# Altium PCB PCB_receiveClient.pcbdoc
Units mil, origin at the board's own origin, x right, y up, seen from the top; angles counter-clockwise.
Board outline 3360 x 2303.74 mil, 2 copper layers (Top Layer, Bottom Layer); 21 components, 44 nets, 97 pads, 19 vias.
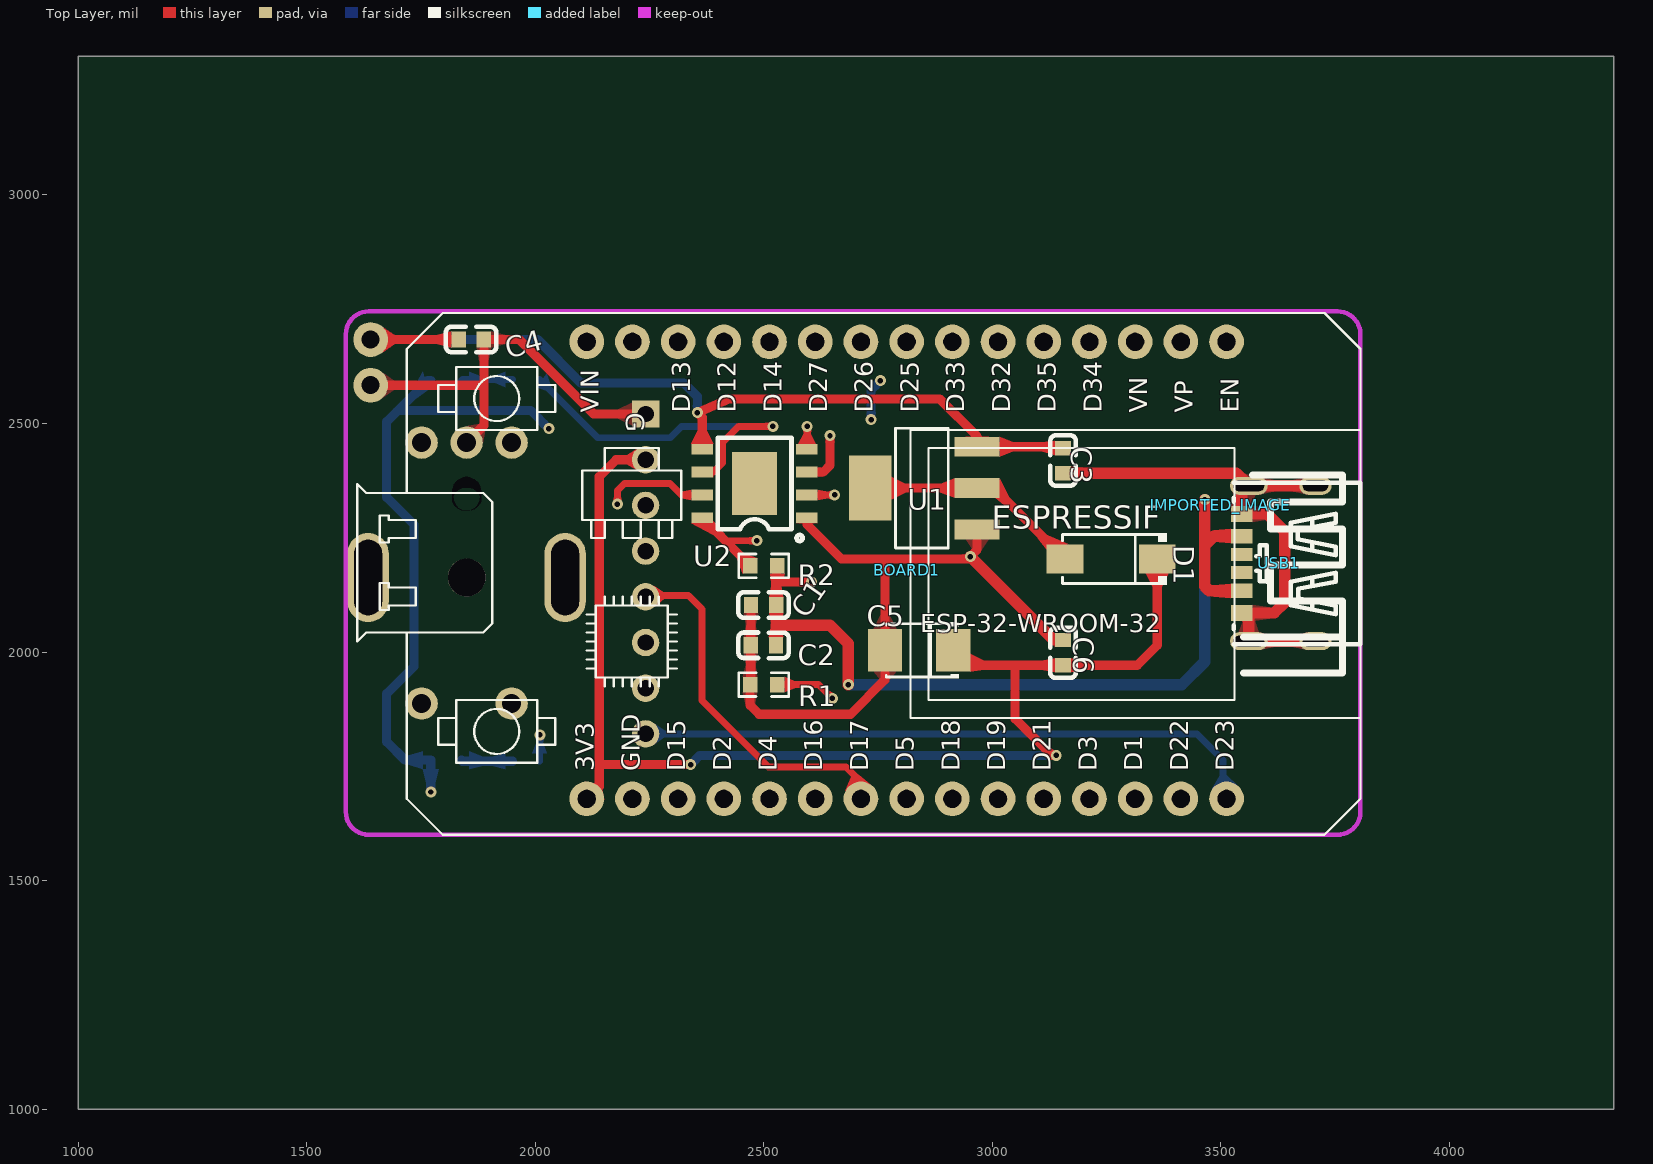
[diagram p0: Top Layer view]
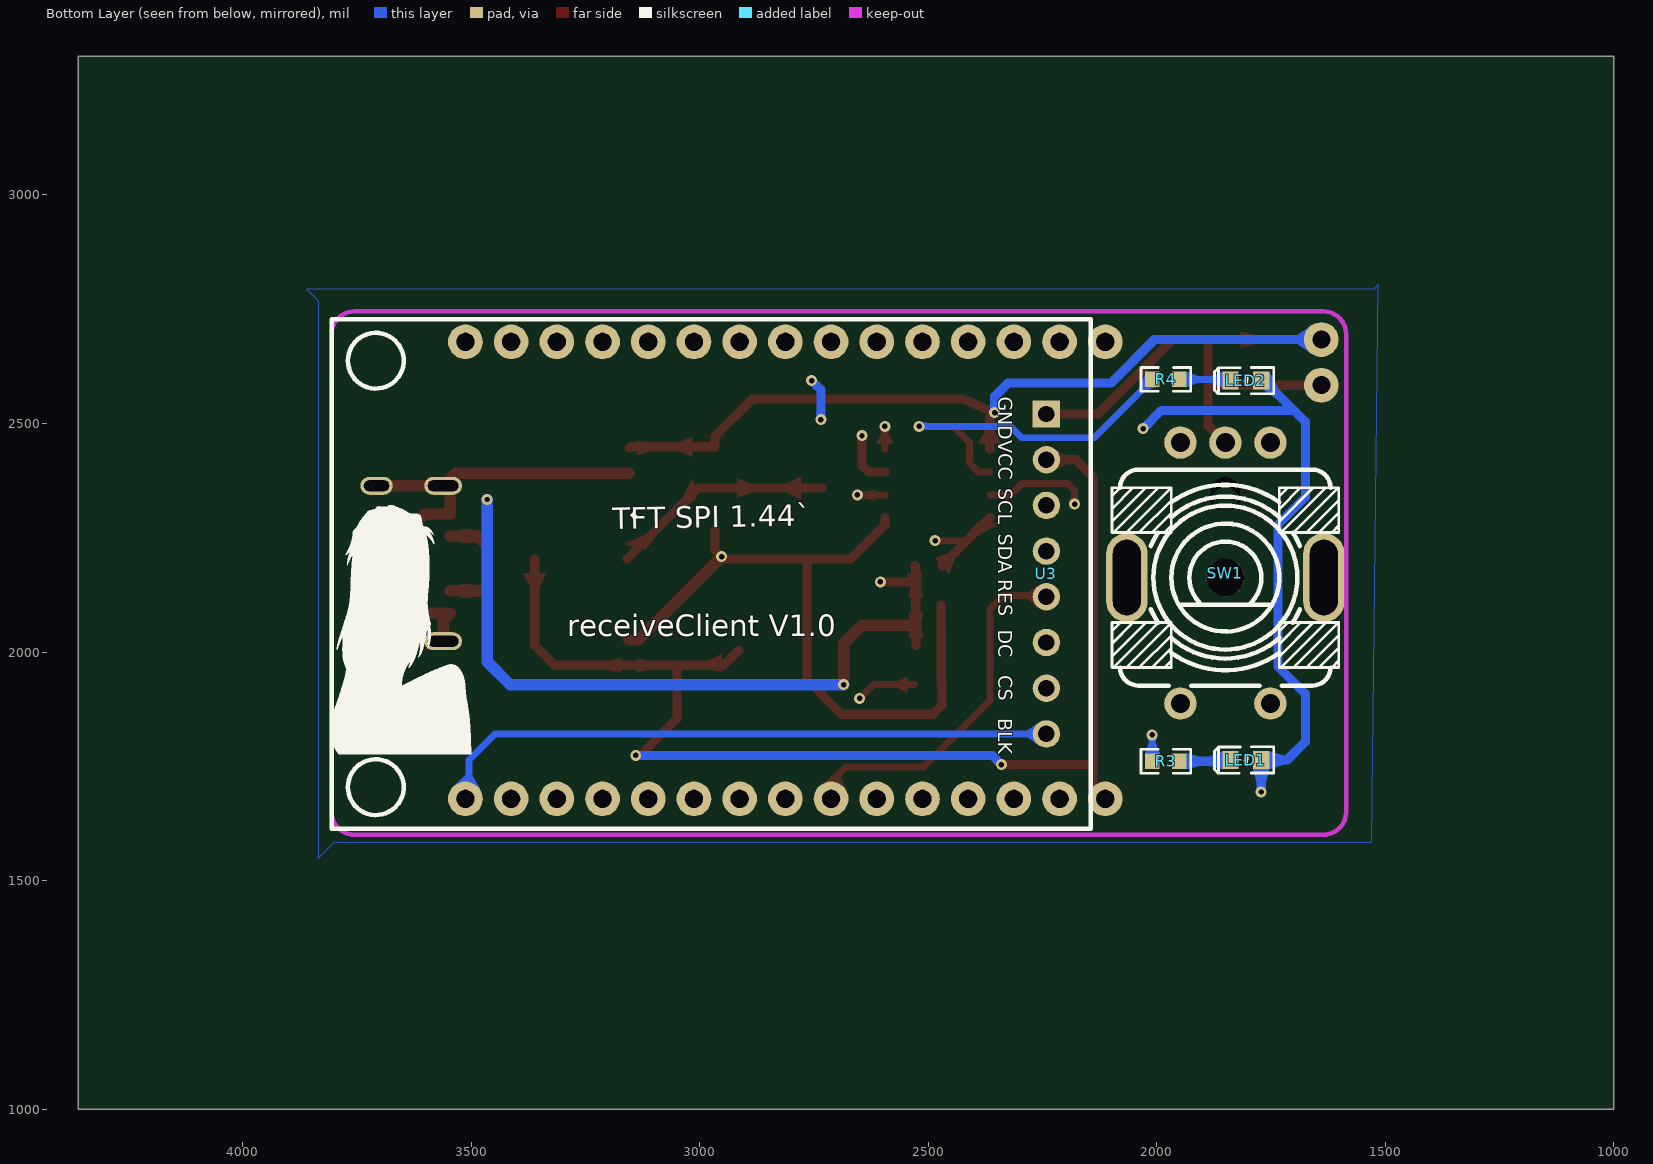
[diagram p1: Bottom Layer view, seen from below]

## Layer stack, top to bottom
Top Layer: signal copper (thickness not stored)
Dielectric: dielectric 12.6, FR-4, Dk 4.8
Bottom Layer: signal copper (thickness not stored)

## Board outline
4360,1000 1000,1000 1000,3303.74 4360,3303.74

## Components (designator, comment, footprint, x,y, rotation, side; value= is the part's Value field where it differs from the comment)
BOARD1 "ESP32DEVKITV1" ESP32-DEVKITV1 2112.68,1678.74 r0 top
C1 "0.1μF" C0603 2499.8,2102.65 r0 top
C2 "10μF" C0603 2499.19,2014.83 r180 top
C3 "10μF" C0603 3154.78,2418.74 r270 top
C4 "0.1μF" C0603 1860,2683.74 r0 top
C5 "100uF" CAP-SMD_L3.5-W2.8-R-RD 2840,2003.74 r0 top
C6 "1μF" C0603 3155,1998.74 r90 top
D1 "SS14" SMA_L4.4-W2.8-LS5.4-RD 3260,2203.74 r180 top
IMPORTED_IMAGE "IMPORTED_IMAGE" IMPORTED_IMAGE 3499.99,2321.36 r0 top
LED1 "LED-0603_R" LED0603_RED 1805,1763.74 r180 bottom
LED2 "LED-0603_G" LED0603_GREEN 1805,2593.74 r180 bottom
R1 "2k" R0603#1 2500,1928.74 r0 top
R2 "0" R0603#1 2500,2188.74 r180 top
R3 "4.7k" R0603#2 1980,1761.01 r0 bottom
R4 "4.7k" R0603#2 1980,2596.47 r0 bottom
SW1 "EC11K1524406" SW-TH_EC11K1524406 1850,2172.77 r180 bottom
U1 "AMS1117-3.3" SOT-223-3_L6.5-W3.4-P2.30-LS7.0-BR 2850,2358.74 r0 top
U2 "TP4056" ESOP-8_L4.9-W3.9-P1.27-LS6.0-BL-EP 2480,2368.74 r90 top
U3 "1.44TFT128X128" 1.44TFT128X128 2241.42,2170.86 r90 bottom
USB1 "KH-TYPE-C-6P" TYPE-C-SMD_TYPE-C-31-M-16 3626.45,2193.74 r90 top
? "" ? 2685,2543.82 r0 top

## Footprints (in the part's own frame and the unit in brackets; to place one, negate y for a bottom-side part, rotate by r counter-clockwise, add the part's x,y. Pads: shape width x height; smd on the part's side, far side on the other; paste and mask are expansions set on the pad)
1.44TFT128X128 [mil]
  rect 60x60 hole 36: 1(350,0)
  round 60 hole 36: 2(250,0) 3(150,0) 4(50,0) 5(-50,0) 6(-150,0) 7(-250,0) 8(-350,0)
  silkscreen extent -557,-97 557,1564
C0603 [mm]
  rect 0.8x0.9 smd: 1(-0.7,0) 2(0.7,0)
  silkscreen extent -1.41,-0.71 1.39,0.72
CAP-SMD_L3.5-W2.8-R-RD [mm]
  rect 1.9x2.376 smd: 1(1.899,0) 2(-1.899,0)
  silkscreen extent -1.83,-1.55 2.21,1.55
ESOP-8_L4.9-W3.9-P1.27-LS6.0-BL-EP [mm]
  rect 0.6x1.2 smd: 1(-1.905,-2.908) 2(-0.635,-2.908) 3(0.635,-2.908) 4(1.905,-2.908) 5(1.905,2.908) 6(0.635,2.908) 7(-0.635,2.908) 8(-1.905,2.908)
  rect 3.5x2.5 smd: 9(0,0)
  silkscreen extent -3.2,-2.67 2.55,2.05
ESP32-DEVKITV1 [mil]
  round 76 hole 39.36: 3V3(0,0) D1(1200,0) D2(300,0) D3(1100,0) D4(400,0) D5(700,0) D12(300,1000) D13(200,1000) D14(400,1000) D15(200,0) D16(500,0) D17(600,0) D18(800,0) D19(900,0) D21(1000,0) D22(1300,0) D23(1400,0) D25(700,1000) D26(600,1000) D27(500,1000) D32(900,1000) D33(800,1000) D34(1100,1000) D35(1000,1000) EN(1400,1000) GND(100,1000) GND@1(100,0) VIN(0,1000) VN(1200,1000) VP(1300,1000)
  silkscreen extent -502,-79 1693,1063
IMPORTED_IMAGE [mil]
LED0603_GREEN [mm]
  rect 0.9x1 smd: 1(0.85,0) 2(-0.85,0)
  silkscreen extent -1.75,-0.73 1.54,0.73
LED0603_RED [mm]
  rect 0.9x1 smd: 1(0.85,0) 2(-0.85,0)
  silkscreen extent -1.75,-0.73 1.54,0.73
R0603#1 [mil]
  rect 31.75x34.02 smd: 1(-29.65,0) 2(29.66,0)
  silkscreen extent -55,-26 55,26
R0603#2 [mil]
  rect 31.75x34.02 smd: 1(29.65,0) 2(-29.65,0)
  silkscreen extent -55,-26 55,26
SMA_L4.4-W2.8-LS5.4-RD [mm]
  rect 2.046x1.62 smd: 1(-2.566,0) 2(2.565,0)
  silkscreen extent -3.08,-1.44 2.7,1.44
SOT-223-3_L6.5-W3.4-P2.30-LS7.0-BR [mm]
  rect 2.5x1.1 smd: 1(2.97,-2.3) 2(2.97,0) 3(2.97,2.3)
  rect 2.34x3.6 smd: 4(-2.97,0)
  silkscreen extent -1.57,-3.33 1.37,3.33
SW-TH_EC11K1524406 [mm]
  round 1.8 hole 1.05: A(2.5,7.25) B(-2.5,7.25) C(0,7.25) D(2.5,-7.25) E(-2.5,-7.25)
  oval 2.3x4.95 hole 1.55 slot 4.2 at 90 deg: MH1(5.475,-0.25) MH2(-5.475,-0.25)
  round 2.1 hole 2.1 unplated: ""(0,-0.25)
  Multi-Layer board cut-out: 0.8,4.55 0.8,3.95 0.59,3.652 0.27,3.478 -0.094,3.465 -0.427,3.614 -0.659,3.895 -0.742,4.25 -0.742,4.25 -0.523,4.556 -0.188,4.728 0.188,4.728 0.523,4.556 0.742,4.25 0.742,4.25 0.742,4.25 0.659,3.895 0.427,3.614 0.094,3.465 -0.27,3.478 -0.59,3.652 -0.8,3.95 -0.8,3.95 -0.8,3.95 -0.8,4.55 -0.8,4.55 -0.721,4.897 -0.499,5.175 -0.178,5.33 0.178,5.33 0.499,5.175 0.721,4.897 0.8,4.55 0.8,4.55 0.8,4.55
  silkscreen extent -6.3,-6.25 6.3,5.75
TYPE-C-SMD_TYPE-C-31-M-16 [mm]
  oval 1x2.1 hole 0.6 slot 1.7 at 90 deg: 1(-4.32,1.65) 2(4.32,1.65)
  oval 1x1.8 hole 0.6 slot 1.4 at 90 deg: 3(-4.32,-2.05) 4(4.32,-2.05)
  rect 0.7x1.2 smd: A5(-0.5,2.05) B5(0.5,2.05)
  rect 0.8x1.2 smd: A9(1.52,2.05) B9(-1.52,2.05)
  rect 0.9x1.2 smd: A12(2.75,2.05) B12(-2.75,2.05)
  silkscreen extent -4.5,-4.55 4.5,2.49
? [mil]

## Free pads (board coordinates)
  round 75.98 hole 39.37: ""(1640,2583.74) ""(1640,2683.74)

## Via types
v1: diameter 24, hole 12, Top Layer to Bottom Layer, 19 vias

## Nets (pads, with @x,y where several pads share a name; then routed paths per layer and width w, separated by ;. In a path a pad name is that pad's centre, name@x,y a point inside that pad or via, vN(x,y) a via of type N, cw(c..) or ccw(c..) an arc to the next point about the centre after c; other vN are vias at no path point)
3V3: BOARD1.3V3 C5.1 C6.1 D1.1 U3.2 | length 2753.2
  Top Layer w20: BOARD1.3V3 2140,1706.04 2140,2383.74 2177.1,2420.84 U3.2@2241.4,2420.84 ; 2140,1759.35 2145.61,1753.74 v1(2340,1753.74) ; C5.1@2914.8,2003.74 2947.3,1971.14 3155,1971.14 3317.4,1971.14 3361,2014.74 D1.1 ; 3044.71,1971.18 3050,1965.89 3050,1853.74 3130,1773.74 v1(3140,1773.74)
  Bottom Layer w20: v1(2340,1753.74) 2360,1773.74 v1(3140,1773.74)
BAT: C3.1 C4.1 pad.@1640,2683.74 U1.3 U2.5 | length 1941.7
  Top Layer w20: pad.@1640,2683.74 C4.1 ; U2.5 2365.5,2513.24 v1(2355,2523.74) 2425,2553.74 2885,2553.74 2966.9,2471.74 U1.3@2966.9,2449.74 ; U1.3@2966.9,2449.24 3151.8,2449.24 C3.1
  Bottom Layer w20: pad.@1640,2683.74 2005,2683.74 2100,2588.74 2325,2588.74 2355,2558.74 v1(2355,2523.74)
BOARD1_D1: BOARD1.D1
BOARD1_D2: BOARD1.D2
BOARD1_D3: BOARD1.D3
BOARD1_D4: BOARD1.D4
BOARD1_D5: BOARD1.D5
BOARD1_D12: BOARD1.D12
BOARD1_D13: BOARD1.D13
BOARD1_D14: BOARD1.D14
BOARD1_D15: BOARD1.D15
BOARD1_D16: BOARD1.D16
BOARD1_D32: BOARD1.D32
BOARD1_D33: BOARD1.D33
BOARD1_D34: BOARD1.D34
BOARD1_D35: BOARD1.D35
BOARD1_EN: BOARD1.EN
BOARD1_GND: BOARD1.GND
BOARD1_VIN: BOARD1.VIN
BOARD1_VN: BOARD1.VN
BOARD1_VP: BOARD1.VP
D0: BOARD1.D25 SW1.D | length 1600
  Mid-Layer 1 w15: SW1.D 1955,2090.74 1955,2343.74 2080,2468.74 2405,2468.74 2485,2548.74 2790,2548.74 2812.7,2571.44 BOARD1.D25
D1: BOARD1.D26 SW1.A | length 1134.3
  Mid-Layer 1 w20: SW1.A 1751.57,2510.31 1825,2583.74 2695,2583.74 2720,2608.74 2720,2671.42 BOARD1.D26
D2: BOARD1.D27 SW1.B | length 835.4
  Mid-Layer 2 w15: SW1.B 1955,2464.74 1955,2563.74 2005,2613.74 2585,2613.74 2612.7,2641.44 BOARD1.D27
GND: BOARD1.GND@1 C1.1 C2.2 C3.2 C4.2 C5.2 C6.2 pad.@1640,2583.74 R1.1 SW1.C SW1.E U1.1 U2.1 U2.3 U3.1 USB1.1 USB1.2 USB1.3 USB1.4 USB1.A12 USB1.B12 | length 8577.3
  Top Layer w20: pad.@1640,2583.74 1887.56,2583.74 ; SW1.C 1887.6,2495.74 C4.2 1965,2683.74 2127.9,2520.84 U3.1@2241.4,2520.84 ; C1.1@2472.2,2102.64 C2.2 2471.6,1930.04 R1.1 2470.3,1883.44 2490,1863.74 2690,1863.74 2765.2,1938.94 2765.2,2003.74 2765.2,2202.04 2766.9,2203.74 ; U2.1 2594.5,2279.24 2670,2203.74 2946.9,2203.74 v1(2951.92,2208.74) 2966.9,2223.74 U1.1 ; U2.3 2630,2393.74 2645,2408.74 v1(2645,2473.74)
  Top Layer w25: v1(2951.92,2208.74) 3134.4,2026.34 C6.2 ; C3.2@3154.8,2391.14 3534.1,2391.14 USB1.2 ; USB1.3@3707.2,2023.64 3561.5,2023.64 3561.5,2069.74 3545.7,2085.44 3616.7,2085.44 3640,2108.74 3640,2263.74 3601.7,2302.04 USB1.A12 3545.7,2348.04 USB1.2 ; USB1.4 USB1.2
  Mid-Layer 1 w20: pad.@1640,2583.74 1640,2428.74 1685,2383.74 1775.53,2383.74 SW1.C ; 2212.7,1678.74 2397.7,1863.74 3445,1863.74 3561.5,1980.24 USB1.1@3561.5,2023.64
  Mid-Layer 2 w15: SW1.E 1949.82,1888.74 2120,1888.74 2150,1858.74 2150,1773.74 2212.68,1711.06 2212.68,1678.74
  Mid-Layer 2 w20: pad.@1640,2583.74 1815,2583.74 1850,2548.74 SW1.C 1960,2348.19 1960,1898.92 SW1.E ; v1(2645,2473.74) 2815,2473.74 2955,2333.74 2955,2211.82 v1(2951.92,2208.74)
  Mid-Layer 2 w25: v1(2951.92,2208.74) 2951.9,2206.84 3135.1,2023.64 3561.5,2023.64 USB1.3@3707.2,2023.64 ; USB1.2 USB1.4
LED1_2: LED1.2 R3.2 | length 112.9
  Bottom Layer w20: LED1.2 1841.2,1761.04 R3.2
LED2_2: LED2.2 R4.2 | length 112.9
  Bottom Layer w15: LED2.2 1841.2,2596.44 R4.2@1950.3,2596.44
SW1_MH1: SW1.MH1
SW1_MH2: SW1.MH2
TFT_BLK: BOARD1.D23 U3.8 | length 1375.4
  Bottom Layer w15: U3.8 3447.88,1820.87 3505,1763.74 3505,1686.42 BOARD1.D23
TFT_CS: BOARD1.D18 U3.7 | length 773.6
  Mid-Layer 2 w15: U3.7 2241.42,1917.32 2395,1763.74 2827.68,1763.74 BOARD1.D18
TFT_DC: BOARD1.D19 U3.6 | length 947.3
  Mid-Layer 2 w15: U3.6 2241.42,2012.32 2320,1933.74 2320,1883.74 2405,1798.74 2892.68,1798.74 BOARD1.D19
TFT_RST: BOARD1.D17 U3.5 | length 795.8
  Top Layer w15: U3.5 2244.29,2123.74 2335,2123.74 2365,2093.74 2365,1893.74 2510,1748.74 2680,1748.74 2712.68,1716.06 BOARD1.D17
TFT_SCL: BOARD1.D22 U3.3 | length 1628.1
  Mid-Layer 2 w15: U3.3 2241.42,2317.32 2370,2188.74 2370,2003.74 2435,1938.74 2435,1898.74 2465,1868.74 3320,1868.74 3410,1778.74 3410,1681.42 BOARD1.D22
TFT_SDA: BOARD1.D21 U3.4 | length 1220.4
  Mid-Layer 2 w15: U3.4@2241.4,2220.84 2252.9,2220.84 2335,2138.74 2335,1978.74 2385,1928.74 2385,1873.74 2425,1833.74 2965,1828.74 3000,1791.44 BOARD1.D21
U1_2: D1.2 U1.2 U1.4 | length 490.1
  Top Layer w20: U1.4 U1.2 3004,2358.74 D1.2
U2_2: R1.2 U2.2 | length 640.3
  Top Layer w15: R1.2 2620,1928.74 v1(2650,1898.74) ; U2.2 v1(2655,2343.74)
  Mid-Layer 2 w15: v1(2650,1898.74) 2650,2338.74 v1(2655,2343.74)
U2_4: R2.2 U2.4 U2.8 | length 610.3
  Top Layer w15: 2415.5,2243.64 v1(2485,2243.74) ; U2.4 v1(2595,2493.74)
  Top Layer w20: U2.8 R2.2
  Mid-Layer 1 w15: v1(2485,2243.74) 2565,2243.74 2595,2273.74 v1(2595,2493.74)
U2_6: R4.1 U2.6 | length 795.8
  Top Layer w15: U2.6 2390,2393.74 2410,2413.74 2410,2458.74 2445,2493.74 v1(2520,2493.74)
  Bottom Layer w15: R4.1@2009.7,2596.44 2137.4,2468.74 2295,2468.74 2320,2493.74 v1(2520,2493.74)
U2_7: R3.1 U2.7 | length 950.1
  Top Layer w15: v1(2180,2323.74) 2180,2353.74 2195,2368.74 2295,2368.74 2320,2343.74 U2.7
  Mid-Layer 1 w15: v1(2010,1818.74) 2155,1818.74 2180,1843.74 v1(2180,2323.74)
  Bottom Layer w15: R3.1 v1(2010,1818.74)
U2_9: U2.9
USB1_A5: USB1.A5
USB1_B5: USB1.B5
VCC: C1.2 C2.1 LED1.1 LED2.1 R2.1 USB1.A9 USB1.B9 | length 4723.4
  Top Layer w20: C2.1@2526.8,2014.84 2527.4,2102.64 2527.4,2186.44 R2.1 ; 2527.4,2153.24 v1(2605,2153.74)
  Top Layer w25: 2527.09,2058.74 2645,2058.74 2685,2018.74 v1(2685,1928.74) ; v1(3465,2333.74) 3465,2233.74 ; USB1.B9 3474.8,2133.94 3465,2143.74 3465,2233.74 ; USB1.A9@3545.7,2253.54 3484.8,2253.54 3465,2233.74
  Mid-Layer 1 w20: v1(2605,2153.74) 2735,2283.74 v1(2735,2508.74)
  Mid-Layer 2 w20: v1(2030,2488.74) 2120,2578.74 2740,2578.74 v1(2755,2593.74)
  Bottom Layer w20: 1697.63,2526.37 1700,2528.74 1990,2528.74 v1(2030,2488.74) ; v1(1771.53,1693.74) LED1.1 1715,1763.74 1675,1803.74 1675,1908.74 1735,1968.74 1735,2278.74 1675,2338.74 1675,2503.74 1765,2593.74 LED2.1 ; v1(2735,2508.74) 2735,2573.74 v1(2755,2593.74)
  Bottom Layer w25: v1(2685,1928.74) 3415,1928.74 3465,1978.74 v1(3465,2333.74)
pads on no net: SW1.

## Polygon pours and split planes (outlines as drawn)
GND on Bottom Layer (solid): 1515,2803.74 1525,2793.74 3860,2793.74 3835,2768.74 3835,1548.74 3800,1583.74 1530,1583.74
GND on Mid-Layer 1 (solid): 1500,2793.74 1505,2788.74 3825,2788.74 3830,2783.74 3830,1563.74 3815,1578.74 1545,1578.74
GND on Top Layer (solid): 1510,2793.74 3825,2793.74 3835,2783.74 3835,1548.74 3825,1558.74 1540,1558.74
GND on Mid-Layer 2 (solid): 1510,2778.74 1515,2783.74 3820,2783.74 3835,2768.74 3835,1543.74 3800,1578.74 1555,1578.74

## Keep-outs
Keep-Out Layer:
  lines w10: 1585.59,1650.27 ccw(c1635.59,1650.27) 1635.59,1600.27 ; 1585.59,2695.28 cw(c1635.59,2695.28) 1635.59,2745.28 ; 3755.59,1600.27 ccw(c3755.59,1650.27) 3805.59,1650.27 ; 3755.59,2745.28 cw(c3755.59,2695.28) 3805.59,2695.28

## Other copper
Top Layer:
  region net U2_4: 2389.12,2286.35 2341.88,2281.93 2388.85,2256.2 2414.7,2258.62
  region net U2_7: 2341.88,2331.93 2341.88,2355.55 2320,2351.24 2320,2336.24
  region net U2_6: 2389.12,2405.55 2389.12,2381.93 2390,2386.24 2390,2401.24
  region net BAT: 2341.88,2455.55 2389.12,2455.55 2375.5,2485.55 2355.5,2485.55
  region net U2_4: 2575.87,2455.55 2613.37,2455.55 2602.34,2478.05 2587.34,2478.05
  region net U2_2: 2618.12,2355.55 2618.12,2331.93 2640.62,2336.24 2640.62,2351.24
  region net U1_2: 2779.13,2383.74 2779.13,2333.74 2809.13,2348.74 2809.13,2368.74
  region net BAT: 3016.14,2470.94 3016.14,2427.64 3046.14,2439.29 3046.14,2459.29
  region net BAT: 2941.92,2470.94 2991.92,2470.94 2976.92,2471.74 2956.92,2471.74
  region net U1_2: 2917.71,2337.09 2917.71,2380.39 2887.71,2368.74 2887.71,2348.74
  region net U1_2: 3016.14,2380.39 3006.54,2337.09 3032.59,2316 3037.72,2339.16
  region net VCC: 2513.78,2171.73 2545.53,2171.73 2537.36,2141.73 2517.36,2141.73
  region net U2_4: 2454.47,2171.73 2486.22,2205.75 2455.96,2217.3 2442.3,2202.67
  region net U2_2: 2545.53,1945.75 2545.53,1911.73 2568.03,1921.24 2568.03,1936.24
  region net 3V3: 3336,2171.85 3386,2171.85 3371,2141.85 3351,2141.85
  region net U1_2: 3118.72,2223.27 3167.16,2235.63 3121.85,2255.03 3099.31,2249.28
  region net 3V3: 2952.15,1996.18 2952.15,1956.97 2982.15,1961.18 2982.15,1981.18
  region net 3V3: 3172.71,1986.93 3172.71,1955.43 3202.71,1961.18 3202.71,1981.18
  region net 3V3: 3137.29,1955.43 3137.29,1986.93 3107.29,1981.18 3107.29,1961.18
  region net BAT: 1816.69,2666.02 1816.69,2701.46 1786.69,2693.74 1786.69,2673.74
  region net BAT: 3137.07,2430.55 3137.07,2462.05 3107.07,2459.29 3107.07,2439.29
  region net VCC: 2511.01,2032.55 2542.5,2032.55 2537.08,2062.55 2517.08,2062.55
  region net VCC: 2543.11,2084.93 2511.62,2084.93 2517.03,2054.93 2537.03,2054.93
  region net VCC: 2511.62,2120.37 2543.11,2120.37 2537.36,2150.37 2517.36,2150.37
  region net VCC: 3522.12,2237.83 3522.12,2269.33 3484.84,2266.09 3484.84,2241.09
  region net VCC: 3522.12,2118.15 3522.12,2149.65 3484.62,2146.39 3484.62,2121.39
  region net 3V3: 3135.49,1784.86 3129.53,1767.88 3120.91,1768.69 3128.26,1789.62
  region net 3V3: 2332.06,1744.74 2332.06,1762.74 2323.66,1763.74 2323.66,1743.74
  region net VCC: 2597.12,2144.69 2597.01,2162.69 2588.6,2163.64 2588.72,2143.64
  region net U2_7: 2171,2331.68 2189,2331.68 2187.5,2340.08 2172.5,2340.08
  region net U2_4: 2603.92,2485.71 2585.92,2485.89 2587.34,2477.48 2602.34,2477.33
  region net U2_4: 2477.08,2234.73 2477.05,2252.73 2468.65,2251.21 2468.67,2236.21
  region net U2_2: 2650.75,1910.72 2638.02,1897.99 2633.14,1904.99 2643.75,1915.6
  region net U2_6: 2512.06,2484.74 2512.06,2502.74 2503.66,2501.24 2503.66,2486.24
  region net BAT: 2366.98,2524.49 2354.25,2511.76 2358.43,2506.17 2372.57,2520.31
  region net BAT: 2365.84,2518.59 2358.75,2535.14 2366.08,2539.37 2373.96,2520.98
  region net U2_2: 2647.06,2334.74 2647.06,2352.74 2638.66,2351.24 2638.66,2336.24
  region net BAT: 1665.13,2655.25 1665.13,2712.23 1691.72,2693.74 1691.72,2673.74
  region net TFT_RST: 2262.79,2099.82 2259.63,2144.71 2281.63,2131.24 2282.69,2116.24
  region net 3V3: 2221.57,2398.37 2221.57,2443.37 2200.57,2430.86 2200.57,2410.86
  region net TFT_RST: 2734.07,1710.15 2678.85,1696.04 2691.43,1726.71 2708.32,1731.02
  region net 3V3: 2110.3,1716.67 2150.61,1676.36 2147.07,1698.99 2132.93,1713.13
Mid-Layer 1:
  region net D1: 2688.02,2649.83 2744.45,2657.89 2730,2628.95 2710,2626.1
  region net D0: 2841.18,2653.61 2784.18,2653.61 2805.18,2627.01 2820.18,2627.01
  region net D0: 1749.35,1922.7 1786.94,1885.12 1790.99,1916.15 1780.38,1926.76
  region net D1: 1778.15,2481.64 1725,2481.64 1741.57,2506.44 1761.57,2506.44
  region net U2_4: 2492.94,2234.74 2492.94,2252.74 2501.34,2251.24 2501.34,2236.24
  region net U2_4: 2586,2485.8 2604,2485.8 2602.5,2477.4 2587.5,2477.4
  region net U2_7: 2171,2315.8 2189,2315.8 2187.5,2307.4 2172.5,2307.4
  region net U2_7: 2017.94,1809.74 2017.94,1827.74 2026.34,1826.24 2026.34,1811.24
  region net VCC: 2616.98,2152.99 2604.25,2165.72 2609.48,2172.36 2623.62,2158.22
  region net VCC: 2726,2500.8 2744,2500.8 2745,2492.4 2725,2492.4
Mid-Layer 2:
  region net TFT_CS: 2874.76,1676.36 2915.06,1716.67 2881.4,1720.63 2870.8,1710.02
  region net TFT_DC: 2974.76,1676.36 3015.06,1716.67 2981.4,1720.63 2970.8,1710.02
  region net TFT_SDA: 3074.76,1676.36 3115.06,1716.67 3081.4,1720.63 3070.8,1710.02
  region net TFT_SCL: 3439.84,1705.32 3382.92,1702.36 3402.5,1730.02 3417.5,1730.79
  region net D2: 2634.07,2647.33 2578.85,2661.44 2591.43,2630.77 2608.32,2626.46
  region net D2: 1925.29,2485.04 1977.94,2477.8 1962.5,2504.96 1947.5,2507.02
  region net TFT_SCL: 2271.42,2320.91 2237.7,2291.1 2262.84,2285.29 2274.1,2295.25
  region net TFT_SDA: 2270.39,2228.65 2245.51,2191.15 2271.22,2191.91 2279.68,2204.67
  region net TFT_DC: 2271.31,2018.3 2235.13,1991.53 2259.61,1983.52 2271.8,1992.54
  region net TFT_CS: 2271.42,1920.9 2237.71,1891.09 2262.84,1885.29 2274.1,1895.25
  region net U2_2: 2661.14,2333.43 2644,2338.94 2642.5,2330.6 2657.5,2325.78
  region net U2_2: 2641,1906.68 2659,1906.68 2657.5,1915.08 2642.5,1915.08
  region net VCC: 2041.98,2487.99 2029.25,2500.72 2034.48,2507.36 2048.62,2493.22
  region net VCC: 2755.75,2581.76 2743.02,2594.49 2736.38,2589.26 2750.52,2575.12
Bottom Layer:
  region net U2_6: 2025.53,2608.67 2002.01,2579.47 2024.28,2571.25 2033.75,2583
  region net LED2_2: 1934.47,2613.48 1934.47,2579.47 1911.97,2588.97 1911.97,2603.97
  region net U2_7: 1993.78,1778.01 2025.53,1778.01 2017.39,1800.51 2002.39,1800.51
  region net LED1_2: 1934.47,1778.01 1934.47,1744 1904.47,1751.01 1904.47,1771.01
  region net VCC: 1765.9,2574.05 1753.82,2613.43 1733.73,2576.62 1740.38,2554.98
  region net LED2_2: 1856.18,2577.72 1856.18,2613.43 1878.68,2603.97 1878.68,2588.97
  region net VCC: 1753.82,1744.05 1789.25,1744.05 1781.53,1714.05 1761.53,1714.05
  region net VCC: 1753.82,1783.43 1753.82,1744.05 1723.82,1753.74 1723.82,1773.74
  region net LED1_2: 1856.18,1744.05 1856.18,1783.43 1886.18,1771.01 1886.18,1751.01
  region net 3V3: 3132.06,1764.74 3132.06,1782.74 3123.66,1783.74 3123.66,1763.74
  region net 3V3: 2351.98,1752.99 2339.25,1765.72 2344.48,1772.36 2358.62,1758.22
  region net VCC: 2726,2516.68 2744,2516.68 2745,2525.08 2725,2525.08
  region net VCC: 2755.75,2581.76 2743.02,2594.49 2736.38,2589.26 2750.52,2575.12
  region net VCC: 2030.75,2500.72 2018.02,2487.99 2011.38,2493.22 2025.52,2507.36
  region net U2_7: 2018.95,1810.75 2000.95,1810.86 2002.4,1802.45 2017.4,1802.36
  region net U2_6: 2512.06,2484.74 2512.06,2502.74 2503.66,2501.24 2503.66,2486.24
  region net BAT: 2346,2531.68 2364,2531.68 2365,2540.08 2345,2540.08
  region net VCC: 1762.53,1701.68 1780.53,1701.68 1781.53,1710.08 1761.53,1710.08
  region net BAT: 1665.13,2655.25 1665.13,2712.23 1691.72,2693.74 1691.72,2673.74
  region net TFT_BLK: 2261.26,1798.36 2261.26,1843.36 2282.26,1828.36 2282.26,1813.36
  region net TFT_BLK: 3537.13,1707.83 3480.76,1699.36 3497.5,1728.78 3512.5,1731.03

## Silkscreen, mask and mechanical layers (free items; w line width, h text height)
Bottom Overlay:
  text "TFT SPI 1.44`" at 3190.7,2253.74 h80 r359
  text "receiveClient V1.0" at 3290,2018.74 h80

## Text inside footprints (layer, text, board x,y; h text height)
BOARD1: Top Overlay "3V3" at 2128.43,1739.37 h40 r90; Top Overlay "GND" at 2228.43,1739.37 h40 r90; Top Overlay "D15" at 2328.43,1739.37 h40 r90; Top Overlay "D2" at 2428.43,1739.37 h40 r90; Top Overlay "D4" at 2528.43,1739.37 h40 r90; Top Overlay "D16" at 2628.43,1739.37 h40 r90; Top Overlay "D17" at 2728.43,1739.37 h40 r90; Top Overlay "D5" at 2828.43,1739.37 h40 r90; Top Overlay "D18" at 2928.43,1739.37 h40 r90; Top Overlay "D19" at 3028.43,1739.37 h40 r90; Top Overlay "D21" at 3128.43,1739.37 h40 r90; Top Overlay "D3" at 3228.43,1739.37 h40 r90; Top Overlay "D1" at 3328.43,1739.37 h40 r90; Top Overlay "D22" at 3428.43,1739.37 h40 r90; Top Overlay "D23" at 3528.43,1739.37 h40 r90; Top Overlay "VIN" at 2139.06,2524.01 h40 r90; Top Overlay "G" at 2199.06,2524.01 h40 r270; Top Overlay "D13" at 2339.06,2524.01 h40 r90; Top Overlay "D12" at 2439.06,2524.01 h40 r90; Top Overlay "D14" at 2539.06,2524.01 h40 r90; Top Overlay "D27" at 2639.06,2524.01 h40 r90; Top Overlay "D26" at 2739.06,2524.01 h40 r90; Top Overlay "D25" at 2839.06,2524.01 h40 r90; Top Overlay "D33" at 2939.06,2524.01 h40 r90; Top Overlay "D32" at 3039.06,2524.01 h40 r90; Top Overlay "D35" at 3139.06,2524.01 h40 r90; Top Overlay "D34" at 3239.06,2524.01 h40 r90; Top Overlay "VN" at 3339.06,2524.01 h40 r90; Top Overlay "VP" at 3439.06,2524.01 h40 r90; Top Overlay "EN" at 3539.06,2524.01 h40 r90; Document "ESP32-DEVKITV1" at 3150.47,1500 h50; Top Overlay "ESPRESSIF" at 2998.5,2269.29 h50; Top Overlay "ESP-32-WROOM-32" at 2842.68,2043.74 h40
U3: Bottom Overlay "BLK" at 2346.43,1854.85 h30 r90; Bottom Overlay "CS" at 2346.43,1948.85 h30 r90; Bottom Overlay "DC" at 2346.43,2048.85 h30 r90; Bottom Overlay "RES" at 2346.43,2158.85 h30 r90; Bottom Overlay "SDA" at 2346.43,2258.85 h30 r90; Bottom Overlay "SCL" at 2346.43,2358.85 h30 r90; Bottom Overlay "VCC" at 2346.43,2463.85 h30 r90; Bottom Overlay "GND" at 2346.43,2558.85 h30 r90